# Altium PCB StairMastersPDB.PcbDoc
Units mil, origin at the board's own origin, x right, y up, seen from the top; angles counter-clockwise.
Board outline 6000 x 4000 mil, 4 copper layers (Top Layer, Layer 1, Layer 2, Bottom Layer), stack 23.756 mil thick; 139 components, 64 nets, 341 pads, 36 vias.
Unrouted connection lines stored in the file: 7.
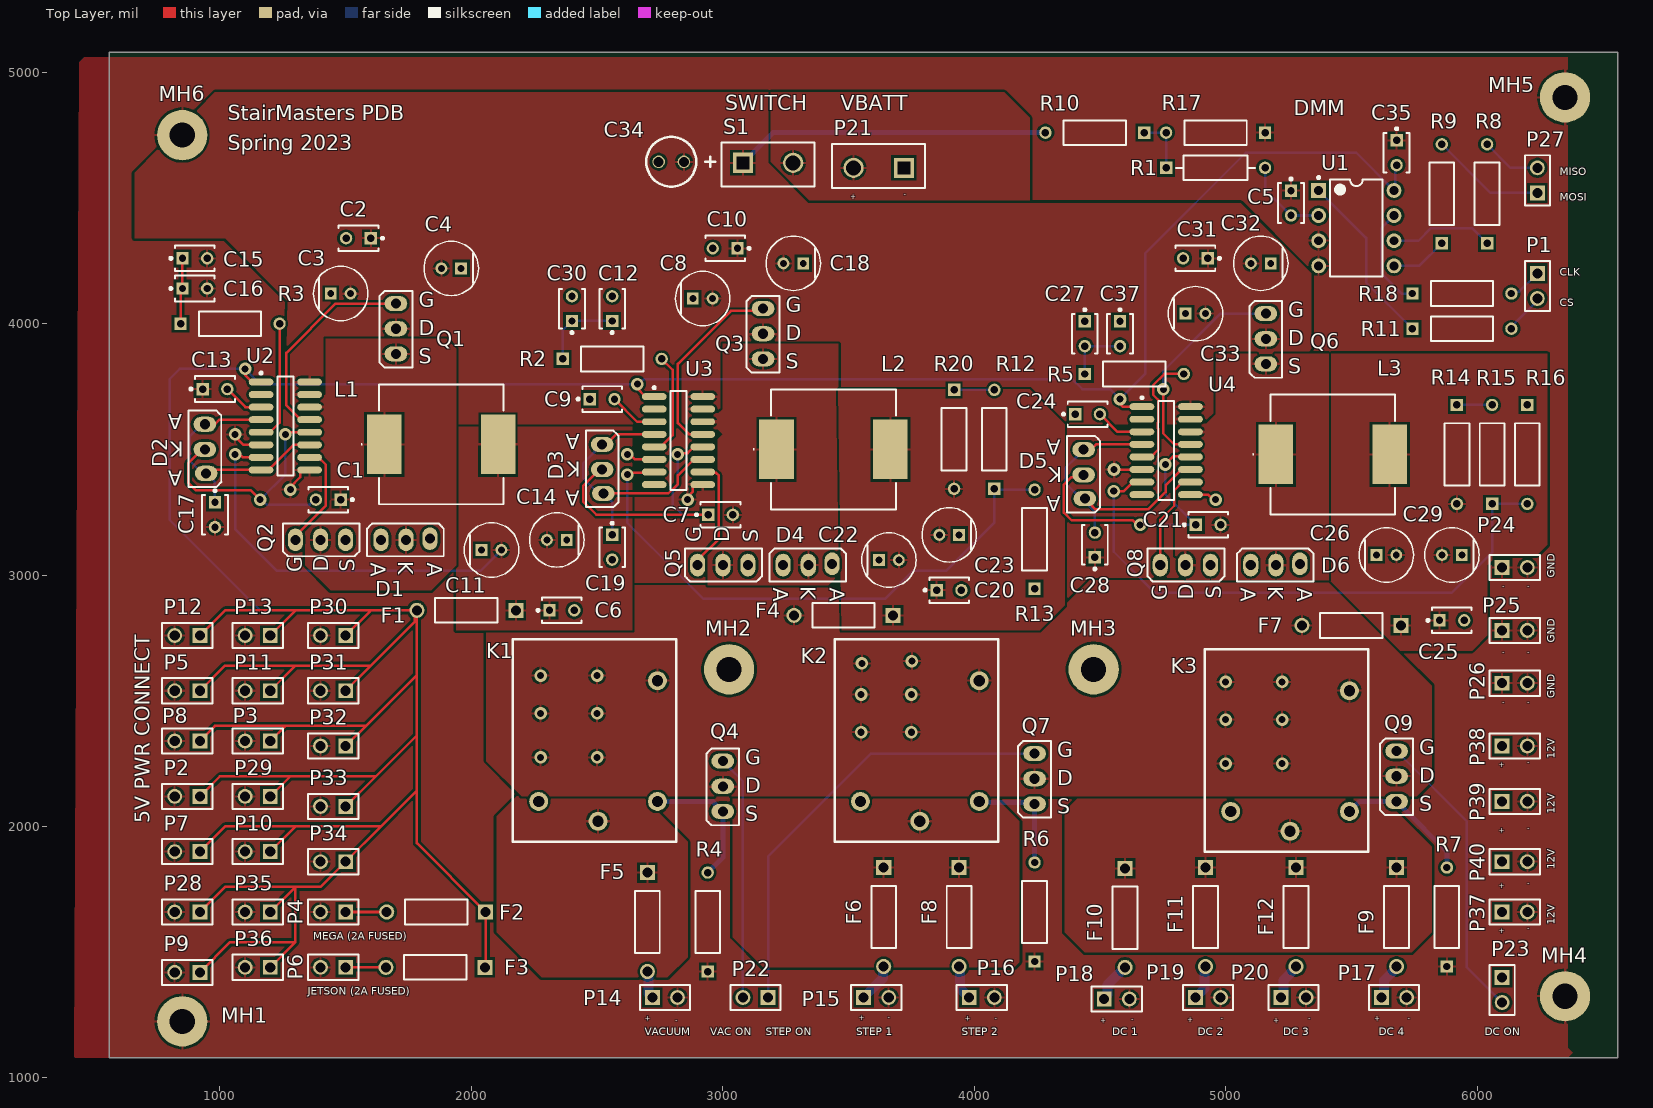
[diagram p0: Top Layer view]
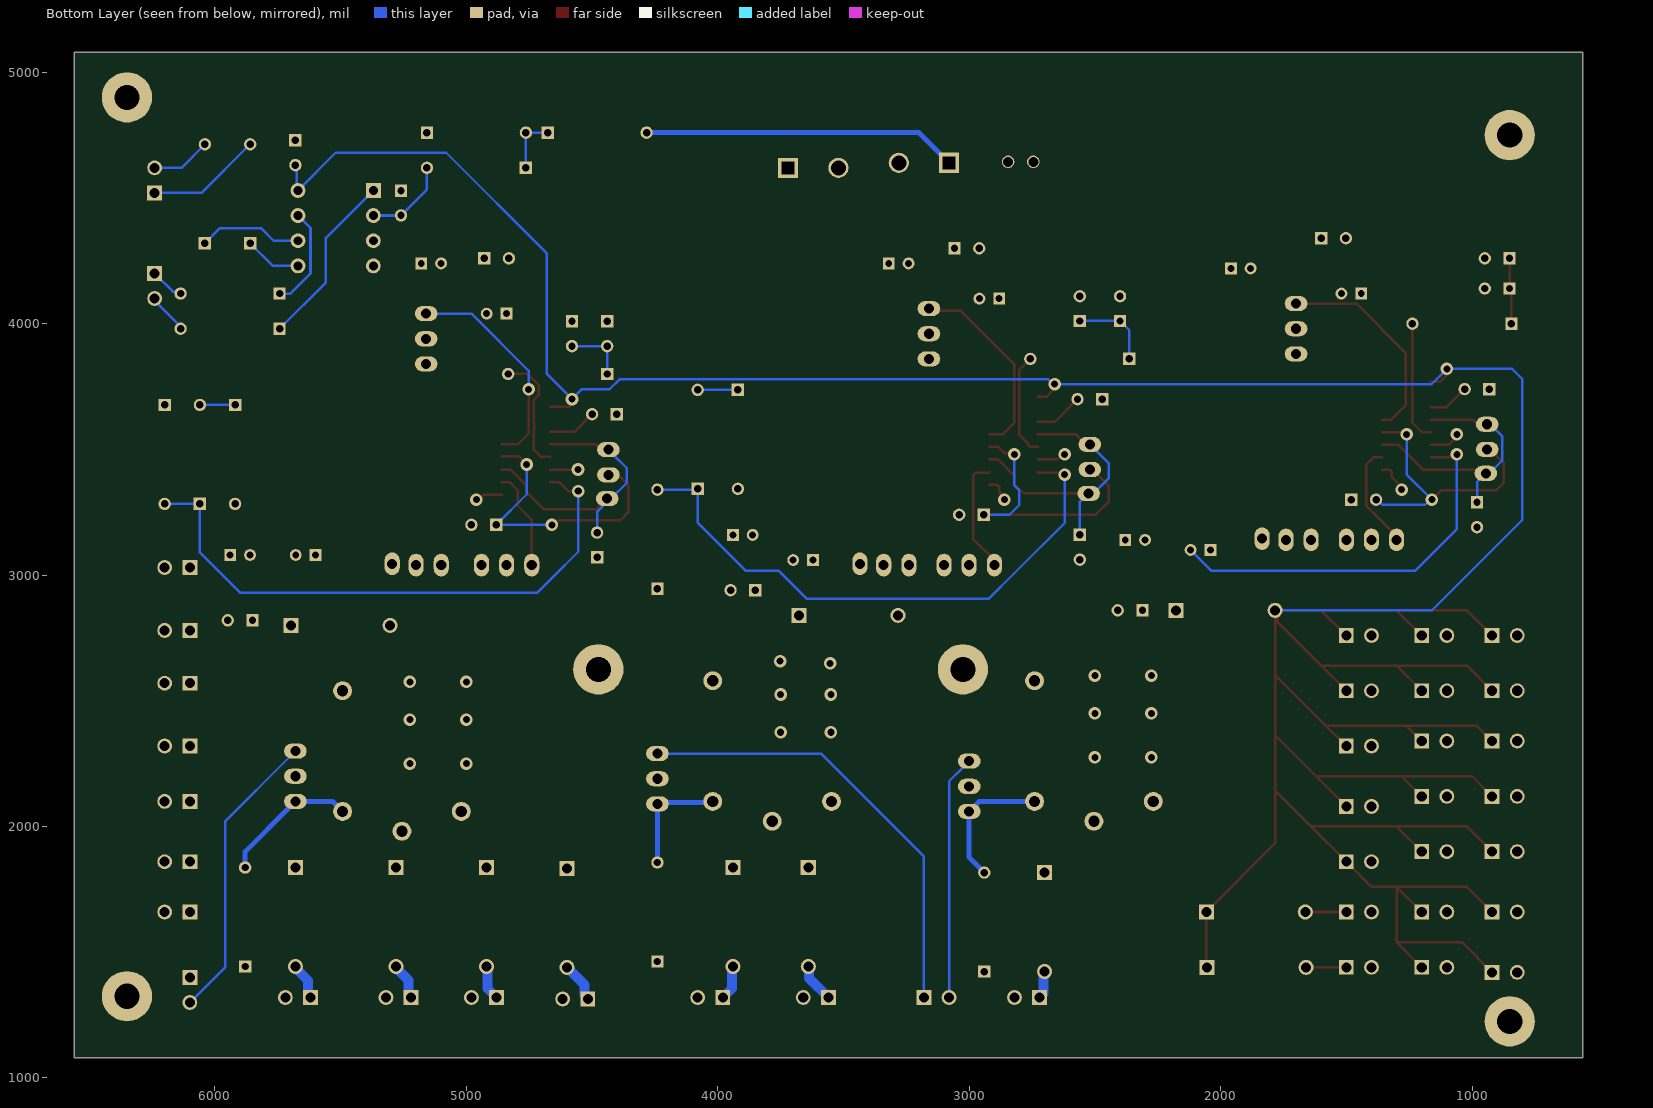
[diagram p1: Bottom Layer view, seen from below]
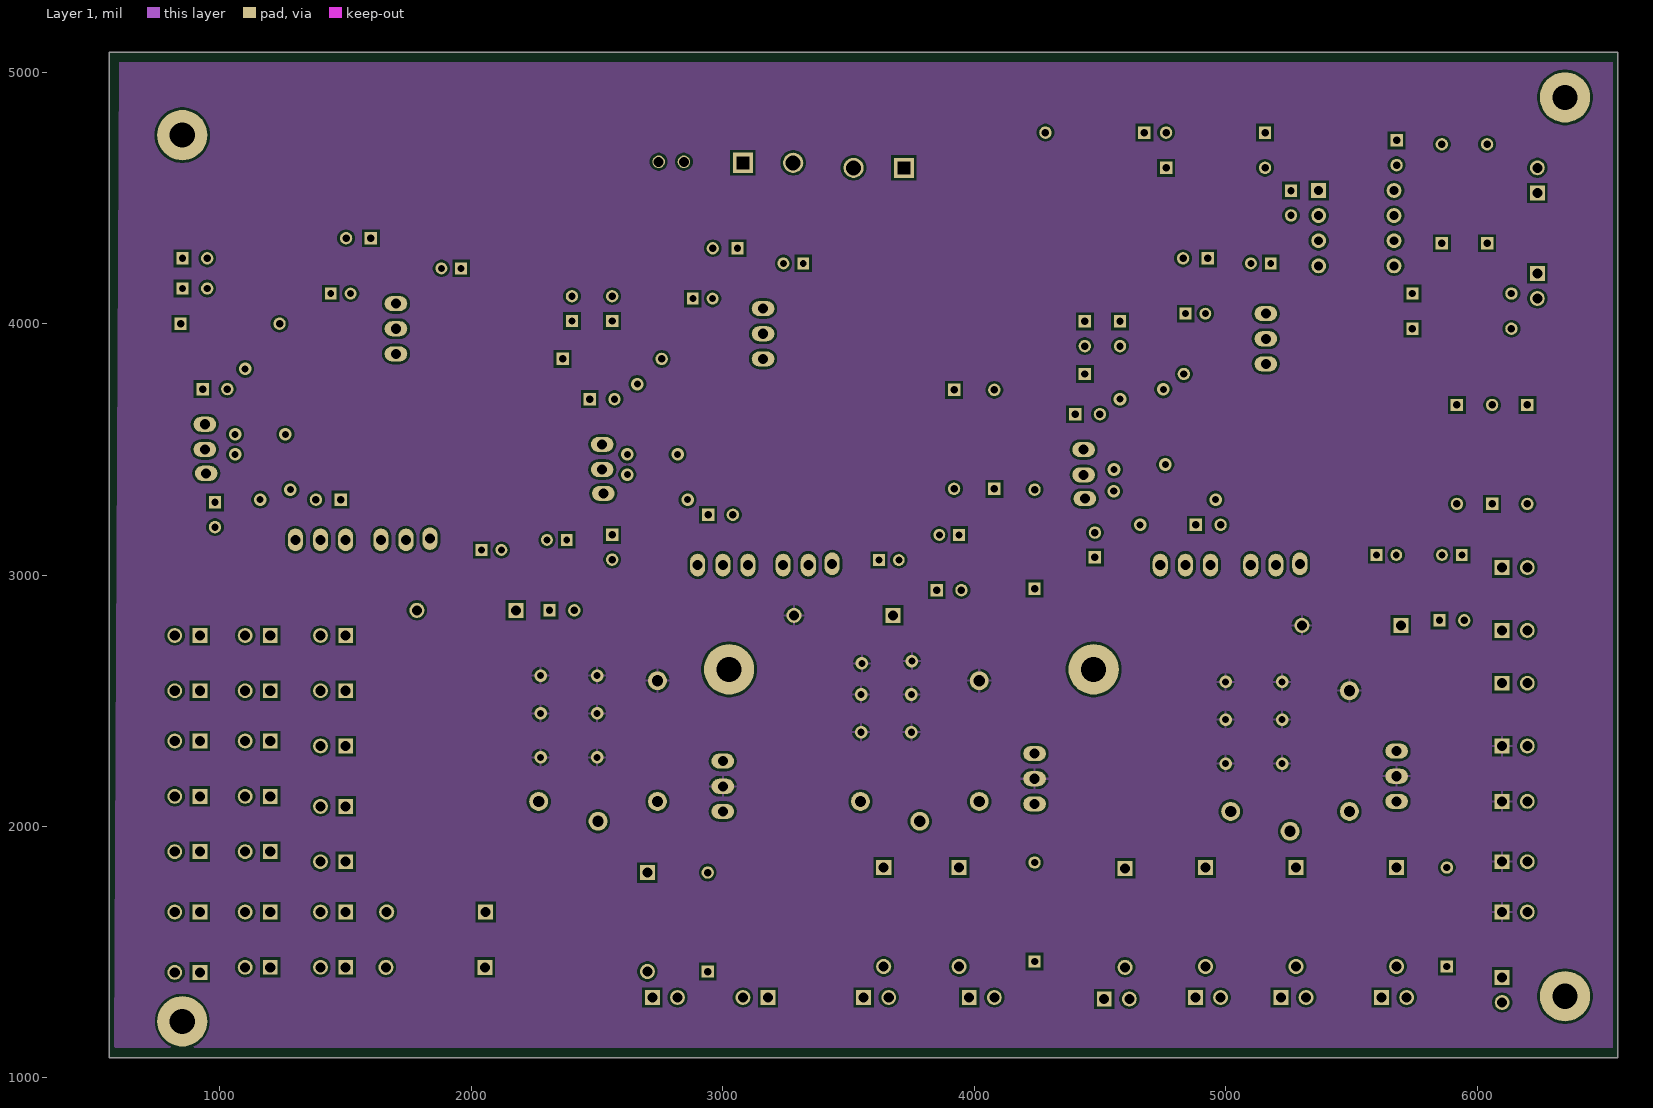
[diagram p2: Layer 1]
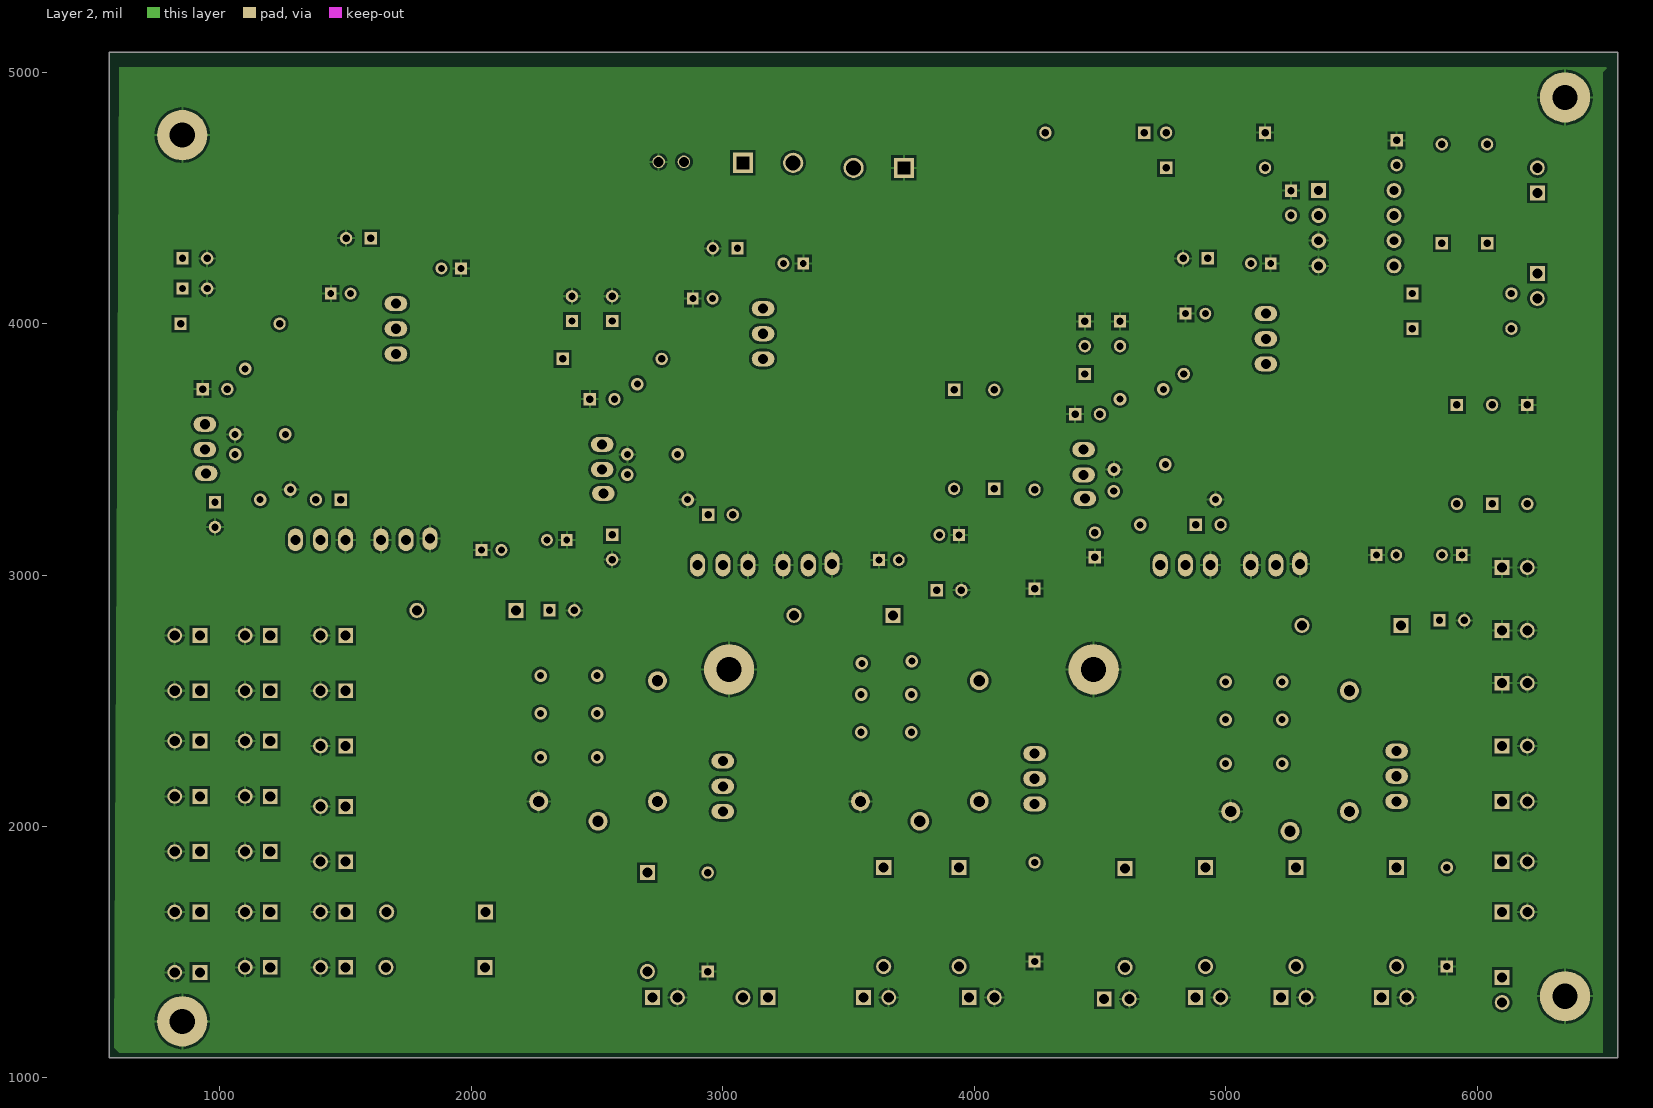
[diagram p3: Layer 2]

## Layer stack, top to bottom
Top Solder: solder mask 0.4, Solder Resist, Dk 3.5
Top Layer: signal copper 1.4
Dielectric 2: prepreg 2.8, PP-006, Dk 4.1
Layer 1: signal copper 1.378
Dielectric 1: dielectric 12.6, FR-4, Dk 4.8
Layer 2: signal copper 1.378
Dielectric 3: prepreg 2.8, PP-006, Dk 4.1
Bottom Layer: signal copper 1.4
Bottom Solder: solder mask 0.4, Solder Resist, Dk 3.5

## Board outline
560,1080 6560,1080 6560,5080 560,5080

## Design rules (kind name [scope] priority, off if disabled: settings)
Clearance [All] p1: gap=10 ignorepadtopadclearanceinfootprint=FALSE except(0: Arc-Hole Track-Hole SMDPad-Hole THPad-Hole Via-Hole Fill-Hole Poly-Hole Region-Hole Text-Hole)
PolygonConnect [All] p1: connectstyle=Relief reliefconductorwidth=10 reliefentries=4 polygonreliefangle="90 Angle" airgapwidth=10
RoutingVias [All] p1: holewidth=28 width=50 viastyle="Through Hole" minholewidth=28 minwidth=50 maxholewidth=28 maxwidth=50
SolderMaskExpansion [All] p1: expansion=4 istentingtop=FALSE
Width [All] p1: maxlimit=100 minlimit=10 preferedwidth=10
30 further rules are at their usual default settings.

## Components (designator, comment, footprint, x,y, rotation, side; value= is the part's Value field where it differs from the comment)
C1 "0.33uF" VISH-K104K15X7RF5TL2 1430.79,3300 r180 top
C2 "0.1uF" VISH-K104K15X7RF5TL2 1550.79,4340 r180 top
C3 "10uF" FP-RAD-TH-D_5_0_5-L_11_1-MFG 1480,4120 r0 top
C4 "10uF" FP-RAD-TH-D_5_0_5-L_11_1-MFG 1920,4220 r180 top
C5 "0.1uF" VISH-K104K15X7RF5TL2 5260,4480 r270 top
C6 "0.1uF" VISH-K104K15X7RF5TL2 2360,2860 r0 top
C7 "0.33uF" VISH-K104K15X7RF5TL2 2990.79,3240 r0 top
C8 "10uF" FP-RAD-TH-D_5_0_5-L_11_1-MFG 2920,4100 r0 top
C9 "0.1uF" VISH-K104K15X7RF5TL2 2520,3700 r0 top
C10 "0.1uF" VISH-K104K15X7RF5TL2 3009.21,4300 r180 top
C11 "10uF" FP-RAD-TH-D_5_0_5-L_11_1-MFG 2080,3100 r0 top
C12 "1nF" VISH-K104K15X7RF5TL2 2560,4060 r90 top
C13 "0.1uF" VISH-K104K15X7RF5TL2 980,3740 r0 top
C14 "10uF" FP-RAD-TH-D_5_0_5-L_11_1-MFG 2340,3140 r180 top
C15 "1nF" VISH-K104K15X7RF5TL2 900,4260 r0 top
C16 "1nF" VISH-K104K15X7RF5TL2 900,4140 r0 top
C17 "4.7uF" VISH-K104K15X7RF5TL2 980,3240 r270 top
C18 "10uF" FP-RAD-TH-D_5_0_5-L_11_1-MFG 3280.63,4240 r180 top
C19 "4.7uF" VISH-K104K15X7RF5TL2 2560,3110.79 r270 top
C20 "0.1uF" VISH-K104K15X7RF5TL2 3900,2940 r0 top
C21 "0.33uF" VISH-K104K15X7RF5TL2 4930.79,3200 r0 top
C22 "10uF" FP-RAD-TH-D_5_0_5-L_11_1-MFG 3660.63,3060 r0 top
C23 "10uF" FP-RAD-TH-D_5_0_5-L_11_1-MFG 3900.63,3160 r180 top
C24 "0.1uF" VISH-K104K15X7RF5TL2 4450.79,3640 r0 top
C25 "0.1uF" VISH-K104K15X7RF5TL2 5900,2820 r0 top
C26 "10uF" FP-RAD-TH-D_5_0_5-L_11_1-MFG 5639.37,3080 r0 top
C27 "1nF" VISH-K104K15X7RF5TL2 4440,3960 r270 top
C28 "4.7uF" VISH-K104K15X7RF5TL2 4480,3120 r90 top
C29 "10uF" FP-RAD-TH-D_5_0_5-L_11_1-MFG 5900,3080 r180 top
C30 "1nF" VISH-K104K15X7RF5TL2 2400,4060 r90 top
C31 "0.1uF" VISH-K104K15X7RF5TL2 4880,4260 r180 top
C32 "10uF" FP-RAD-TH-D_5_0_5-L_11_1-MFG 5140,4240 r180 top
C33 "10uF" FP-RAD-TH-D_5_0_5-L_11_1-MFG 4880,4040 r0 top
C34 "39uF" polarized_radial_cap_TH 2745,4644 r0 top
C35 "0.1uF" VISH-K104K15X7RF5TL2 5680,4680 r270 top
C37 "1nF" VISH-K104K15X7RF5TL2 4580,3960 r270 top
D1 "20A Diode" DIODE-3-TH 1740,3140 r270 top
D2 "20A Diode" DIODE-3-TH 940,3500 r180 top
D3 "20A Diode" DIODE-3-TH 2520,3420 r180 top
D4 "20A Diode" DIODE-3-TH 3340,3040 r270 top
D5 "20A Diode" DIODE-3-TH 4435,3399 r180 top
D6 "20A Diode" DIODE-3-TH 5200,3040 r270 top
F1 "20A Fuse" TH_RESISTOR 1980,2860 r180 top
F2 "2A Fuse" TH_RESISTOR 1860,1660 r180 top
F3 "2A Fuse" TH_RESISTOR 1856.85,1440 r180 top
F4 "20A Fuse" TH_RESISTOR 3480,2840 r180 top
F5 "10A Fuse" TH_RESISTOR 2700,1620 r270 top
F6 "1.5A Fuse" TH_RESISTOR 3640,1640 r270 top
F7 "20A Fuse" TH_RESISTOR 5500,2800 r180 top
F8 "1.5A Fuse" TH_RESISTOR 3940,1640 r270 top
F9 "5A Fuse" TH_RESISTOR 5680,1640 r270 top
F10 "5A Fuse" TH_RESISTOR 4600,1636.85 r270 top
F11 "5A Fuse" TH_RESISTOR 4920,1640 r270 top
F12 "5A Fuse" TH_RESISTOR 5280,1640 r270 top
K1 "3-1393239-8" PR12-12V-360-1A 2740,2099.68 r270 top
K2 "3-1393239-8" PR12-12V-360-1A 4020,2099.68 r270 top
K3 "3-1393239-8" PR12-12V-360-1A 5492.44,2060 r270 top
L1 "2.2uH" SRP1265WA2R2M 1880,3520 r0 top
L2 "2.2uH" SRP1265WA2R2M 3440,3500 r0 top
L3 "2.2uH" SRP1265WA2R2M 5426.38,3480 r0 top
MH1 "Mech_hole" "Mounting Hole" 850,1225 r0 top
MH2 "Mech_hole" "Mounting Hole" 3025,2625 r0 top
MH3 "Mech_hole" "Mounting Hole" 4475,2625 r0 top
MH4 "Mech_hole" "Mounting Hole" 6350,1325 r0 top
MH5 "Mech_hole" "Mounting Hole" 6350,4900 r0 top
MH6 "Mech_hole" "Mounting Hole" 850,4750 r0 top
P1 "Header 2" HDR1X2 6240,4200 r270 top
P2 "Header 2" HDR1X2 920,2120 r180 top
P3 "Header 2" HDR1X2 1200,2340 r180 top
P4 "Header 2" HDR1X2 1500,1660 r180 top
P5 "Header 2" HDR1X2 920,2540 r180 top
P6 "Header 2" HDR1X2 1500,1440 r180 top
P7 "Header 2" HDR1X2 920,1900 r180 top
P8 "Header 2" HDR1X2 920,2340 r180 top
P9 "Header 2" HDR1X2 920,1420 r180 top
P10 "Header 2" HDR1X2 1200,1900 r180 top
P11 "Header 2" HDR1X2 1200,2540 r180 top
P12 "Header 2" HDR1X2 920,2760 r180 top
P13 "Header 2" HDR1X2 1200,2760 r180 top
P14 "Header 2" HDR1X2 2720,1320 r0 top
P15 "Header 2" HDR1X2 3560,1320 r0 top
P16 "Header 2" HDR1X2 3980,1320 r0 top
P17 "Header 2" HDR1X2 5620,1320 r0 top
P18 "Header 2" HDR1X2 4517,1314 r0 top
P19 "Header 2" HDR1X2 4880,1320 r0 top
P20 "Header 2" HDR1X2 5220,1320 r0 top
P21 "Header 2" PWR_HDR1X2 3720,4620 r180 top
P22 "Header 2" HDR1X2 3180,1320 r180 top
P23 "Header 2" HDR1X2 6100,1400 r270 top
P24 "Header 2" HDR1X2 6100,3030 r0 top
P25 "Header 2" HDR1X2 6100,2780 r0 top
P26 "Header 2" HDR1X2 6100,2570 r0 top
P27 "Header 2" HDR1X2 6240,4520 r90 top
P28 "Header 2" HDR1X2 920,1660 r180 top
P29 "Header 2" HDR1X2 1200,2120 r180 top
P30 "Header 2" HDR1X2 1500,2760 r180 top
P31 "Header 2" HDR1X2 1500,2540 r180 top
P32 "Header 2" HDR1X2 1500,2320 r180 top
P33 "Header 2" HDR1X2 1500,2080 r180 top
P34 "Header 2" HDR1X2 1500,1860 r180 top
P35 "Header 2" HDR1X2 1200,1660 r180 top
P36 "Header 2" HDR1X2 1200,1440 r180 top
P37 "Header 2" HDR1X2 6100,1660 r0 top
P38 "Header 2" HDR1X2 6100,2320 r0 top
P39 "Header 2" HDR1X2 6100,2100 r0 top
P40 "Header 2" HDR1X2 6100,1860 r0 top
Q1 "MOSFET-N" FET-3-TH 1700,3980 r0 top
Q2 "MOSFET-N" FET-3-TH 1400,3140 r90 top
Q3 "MOSFET-N" FET-3-TH 3160,3960 r0 top
Q4 "MOSFET-N" FET-3-TH 3000,2160 r0 top
Q5 "MOSFET-N" FET-3-TH 3000,3040 r90 top
Q6 "MOSFET-N" FET-3-TH 5160,3940 r0 top
Q7 "MOSFET-N" FET-3-TH 4240,2190 r0 top
Q8 "MOSFET-N" FET-3-TH 4840,3040 r90 top
Q9 "MOSFET-N" FET-3-TH 5680,2200 r0 top
R1 "1kOhm" FP-MRS25-MFG 4960,4620 r0 top
R2 "10k" FP-MBB0207-MFG 2560,3860 r0 top
R3 "10k" FP-MBB0207-MFG 1040,4000 r0 top
R4 "10k" FP-MBB0207-MFG 2940,1620 r90 top
R5 "10k" FP-MBB0207-MFG 4636.85,3800 r0 top
R6 "10k" FP-MBB0207-MFG 4240,1660 r90 top
R7 "10k" FP-MBB0207-MFG 5880,1640 r90 top
R8 "100Ohm" FP-MBB0207-MFG 6040,4516.85 r90 top
R9 "100Ohm" FP-MBB0207-MFG 5860,4516.85 r90 top
R10 "15k" FP-MBB0207-MFG 4480,4760 r180 top
R11 "100Ohm" FP-MBB0207-MFG 5940,3980 r0 top
R12 "10k" FP-MBB0207-MFG 4080,3540 r90 top value=100kR
R13 "2.2k" FP-MBB0207-MFG 4240,3143.15 r90 top value=11kR
R14 "10k" FP-MBB0207-MFG 5920,3480 r270 top value=100kR
R15 "10k" FP-MBB0207-MFG 6060,3480 r90 top value=100kR
R16 "2.2K" FP-MBB0207-MFG 6200,3480 r270 top value=11kR
R17 "5k" FP-MBB0207-MFG 4960,4760 r180 top
R18 "100Ohm" FP-MBB0207-MFG 5940,4120 r0 top
R20 "10k" FP-MBB0207-MFG 3920,3540 r270 top value=100kR
S1 "PWR_SW" PWR_HDR1X2 3080,4640 r0 top
U1 "MCP3202-CI/P" PDIP300-P8 5520,4380 r0 top
U2 "LTC1775CS#PBF" LT-S-16_M 1260,3593.15 r0 top
U3 "LTC1775CS#PBF" LT-S-16_M 2823.54,3535 r0 top
U4 "LTC1775CS#PBF" LT-S-16_M 4763.54,3495 r0 top

## Footprints (in the part's own frame and the unit in brackets; to place one, negate y for a bottom-side part, rotate by r counter-clockwise, add the part's x,y. Pads: shape width x height; smd on the part's side, far side on the other; paste and mask are expansions set on the pad)
DIODE-3-TH [mil] "TO, Flat Index; 3 In-Line, Axial Leads; Body Dia. 4.6mm; Lead Dia. 0.5 mm (max)"
  oval 90x60 hole 40: 1(-5,95) 2(0,0) 3(0,-100)
  silkscreen extent -66,-155 65,150
FET-3-TH [mil] "TO, Flat Index; 3 In-Line, Axial Leads; Body Dia. 4.6mm; Lead Dia. 0.5 mm (max)"
  oval 90x60 hole 40: 1(0,0) 2(0,100) 3(0,-100)
  silkscreen extent -66,-155 65,150
FP-MBB0207-MFG [mm]
  rect 1.25x1.25 hole 0.75 paste-1000 mask+0: 1(-5,0)
  round 1.25 hole 0.75 paste-1000 mask+0: 2(5,0)
  silkscreen extent -3.15,-1.25 3.15,1.25, body extent -5.72,-1.35 5.72,1.35, height 0.25
FP-MRS25-MFG [mm]
  rect 1.25x1.25 hole 0.75 paste-1000 mask+0: 1(-5,0)
  round 1.25 hole 0.75 paste-1000 mask+0: 2(5,0)
  silkscreen extent -3.98,-1.25 3.98,1.25, body extent -5.72,-1.35 5.72,1.35, height 0.25
FP-RAD-TH-D_5_0_5-L_11_1-MFG [mm]
  rect 1.2x1.2 hole 0.7 paste-1000 mask+0: 1(-1,0)
  round 1.2 hole 0.7 paste-1000 mask+0: 2(1,0)
  silkscreen extent -2.75,-2.75 2.75,2.75, body extent -2.85,-2.85 2.85,2.85, height 0.25
HDR1X2 [mm] "Connector; Header; 2 Position"
  rect 1.5x1.5 hole 1.016: 1(0,0)
  round 1.5 hole 1.016: 2(2.54,0)
  silkscreen extent -1.27,-1.27 3.81,1.27
LT-S-16_M [mm] "SOP, 16-Leads, Body 10x4mm, Pitch 1.27mm, IPC Low Density"
  oval 2.5x0.7 smd: 1(-2.45,4.445) 2(-2.45,3.175) 3(-2.45,1.905) 4(-2.45,0.635) 5(-2.45,-0.635) 6(-2.45,-1.905) 7(-2.45,-3.175) 8(-2.45,-4.445) 9(2.45,-4.445) 10(2.45,-3.175) 11(2.45,-1.905) 12(2.45,-0.635) 13(2.45,0.635) 14(2.45,1.905) 15(2.45,3.175) 16(2.45,4.445)
  silkscreen extent -2.57,-5 0.8,5.47, body extent -2,-5 2,5, height 1.76
"Mounting Hole" [mil]
  round 200 hole 100: 1(0,0)
PDIP300-P8 [mm] "8-Pin Plastic Dual In-Line Package (PDIP)"
  rect 1.5x1.5 hole 0.9: 1(-3.81,3.81)
  round 1.5 hole 0.9: 2(-3.81,1.27) 3(-3.81,-1.27) 4(-3.81,-3.81) 5(3.81,-3.81) 6(3.81,-1.27) 7(3.81,1.27) 8(3.81,3.81)
  silkscreen extent -3.93,-4.9 2.65,5.23, body extent -3.55,-4.9 3.55,4.9, height 4.32
polarized_radial_cap_TH [mil]
  round 50 hole 40: 1(0,0) 2(100,0)
  silkscreen extent -49,-99 225,99
PR12-12V-360-1A [mil] "General Puropse Relay"
  round 75 hole 45: 1(0,0) 2(78.74,-236.22) 3(0,-472.44) 4(-480.32,0)
  silkscreen extent -645,-575 160,75
PWR_HDR1X2 [mil] "Power Connector; Header; 2 Position"
  rect 80x80 hole 50 square: 1(0,0)
  round 80 hole 60: 2(200,0)
  silkscreen extent -85,-95 285,80
SRP1265WA2R2M [mm]
  rect 3.5x6 smd: 1(-5.75,0) 2(5.75,0)
  silkscreen extent -8.1,-6.05 6.3,6.05, body extent -10,-3.38 10,3.38, height 5.8
TH_RESISTOR [mil]
  rect 60x60 hole 40 paste-39370.1 mask+0: 1(-196.85,0)
  round 60 hole 40 paste-39370.1 mask+0: 2(196.85,0)
  silkscreen extent -124,-49 124,49, body extent -225,-53 225,53, height 10
VISH-K104K15X7RF5TL2 [mm] "THD, 2-Leads, Body 4x2.6mm"
  rect 1.25x1.25 hole 0.75: 1(-1.25,0)
  round 1.25 hole 0.75: 2(1.25,0)
  silkscreen extent -2.55,-1.3 2,1.3, body extent -2,-1.3 2,1.3, height 5.6

## Part data
C1 C2 C5 C6 C7 C9 C10 C12 C13 C15 C16 C17 C19 C20 C21 C24 C25 C27 C28 C30 C31 C35 C37: library part CMP-2000-06508-1, "Ceramic Capacitor, 100 nF, +/- 10%, 50 V, -55 to 125 degC, 2-Pin THD, RoHS, Tape and Reel", Capacitance=0.1µF, Manufacturer=Vishay, Operating Temperature=-55°C~125°C, Package / Case=Radial, Package Description="2-Pin Through Hole Device, Body 4 x 2.6 mm", Package Reference=K104K15X7RF5TL2, Ratings=-, Standard Package=1, Temperature Coefficient=X7R, Tolerance=±10%, Voltage - Rated=50V, Applications=GeneralPurpose, Catalog Drawings=Mono-KapSide2-15_5.58Mono-KapSide1_15, Category=Capacitors, Datasheet URL=http://www.vishay.com/docs/45171/kseries.pdf, Datasheet Version=08/2013, Family=CeramicCapacitors, Features=-, Height - Seated (Max)="0.220\"(5.58mm)", Lead Spacing="0.098\"(2.50mm)", Lead Style=Straight, Manufacturer URL=http://www.vishay.com/, Mounting Technology=ThroughHole, Mounting Type=ThroughHole, Online Catalog=Mono-Kap™Series, Other Names=BC1084CT, Packaging=CutTape(CT), Series=Mono-Kap™K, Size / Dimension="0.157\"Lx0.098\"W(4.00mmx2.50mm)", Thickness (Max)=-
C3 C4 C8 C11 C14 C18 C22 C23 C26 C29 C32 C33: library part CMP-05427-001989-1, "Aluminum Electrolytic Capacitors (Radial Lead Type) AEC-Q200 Qualified 22uF ±20% 50V", Capacitance=22uF, Case/Package=Radial, ESR (Equivalent Series Resistance)=1.3R, Leakage Current=3uA, Max Operating Temperature=105°C, Min Operating Temperature=-55°C, Package Quantity=2000, Ripple Current=155mA, Tolerance=20%, Voltage Rating=50V, Contact Plating=Tin, Diameter=5mm, Features="General Purpose", Height=11mm, Height - Seated (Max)=0.472inch, Impedance=1.3R, Lead Diameter=0.5mm, Lead Pitch=0.197inch, Length=11mm, Life (Hours)=1000Hour, Mount="Through Hole", Packaging="Tape and Reel", Polarity=Polar, Radiation Hardening=No, RoHS Compliant=Yes, Series=FC, Termination=Radial, Voltage Rating (DC)=50V
C34: library part "39uF capacitor", "Cap Aluminum 39uF 25V 20% (6.3 X 7mm) Radial 5mm 200mA 1000 hr 105C Ammo Pack", Manufacturer=Panasonic, Manufacturer Part Number=EEA-FC1E390B, Supplier Part Number=667-EEA-FC1E390B, Category="Aluminum Electrolytic Capacitors", ComponentLink1Description=https://datasheet.ciiva.com/24234/aba0000ce22-68457-24234377.pdf?src-supplier=Mouser, ComponentLink1URL=https://datasheet.ciiva.com/24234/aba0000ce22-68457-24234377.pdf?src-supplier=Mouser, ComponentLink2Description=https://datasheet.ciiva.com/11680/aba0000ce22-11680271.pdf?src-supplier=Avnet, ComponentLink2URL=https://datasheet.ciiva.com/11680/aba0000ce22-11680271.pdf?src-supplier=Avnet, Pricing="1=0.47000, 10=0.32500, 50=0.22800, 100=0.19500, 1000=0.14700, 10000=0.11000 (USD)", RoHS=Yes, Stock=1295, Supplier=Mouser
D1 D2 D3 D4 D5 D6: Manufacturer=Rohm, Manufacturer Part Number=RB215T-90NZC9, Supplier Part Number=755-RB215T-90NZC9, ComponentLink1Description=http://datasheet.octopart.com/RB215T-90NZC9-Rohm-datasheet-142143394.pdf?src-supplier=Rs, ComponentLink1URL=http://datasheet.octopart.com/RB215T-90NZC9-Rohm-datasheet-142143394.pdf?src-supplier=Rs, Pricing="1=3.30000, 10=2.96000, 50=2.96000, 100=2.43000, 500=2.07000, 1000=1.74000, 2000=1.61000, 5000=1.59000, 10000=1.59000 (USD)", RoHS=No, Stock=1994, Supplier=Mouser
F1 F4 F7: "Electric Fuse, Fast Blow, 20A, 1000A (IR), 3AB", Current Rating=20A, Manufacturer=Littelfuse, Manufacturer Part Number=0314020.MX52LEP, Max Operating Temperature=125°C, Min Operating Temperature=-55°C, Pre-arcing Rating=631A2/s, Rated Breaking Capacity=1kA, Supplier Part Number=0314020.MX52LEP-ND, Voltage Rating=250V, Blow Characteristic=FAST, Body Height=31.75mm, Body Length or Diameter=6.35mm, Category=Fuses, Circuit Protection Type="Electric Fuse", ComponentLink1Description=https://datasheet.ciiva.com:443/pdfs/VipMasterIC/IC/LFSI/LFSI-S-A0000790503/LFSI-S-A0000790503-1.pdf?src-supplier=IHS+Markit, ComponentLink1URL=https://datasheet.ciiva.com:443/pdfs/VipMasterIC/IC/LFSI/LFSI-S-A0000790503/LFSI-S-A0000790503-1.pdf?src-supplier=IHS+Markit, ComponentLink2Description=https://datasheet.ciiva.com/304/littelfuse-fuse-314p-324p-304224.pdf?src-supplier=Digi-Key, ComponentLink2URL=https://datasheet.ciiva.com/304/littelfuse-fuse-314p-324p-304224.pdf?src-supplier=Digi-Key, Fuse Size=3AB, Pricing="1=1.59000, 5=1.54200, 10=1.44200, 50=1.19300, 100=0.99420, 250=0.96940, 500=0.82026, 1000=0.72083, 5000=0.64626 (USD)", Reach SVHC Compliant=Yes, Reference Standard=UL, RoHS=Yes, RoHS Compliant=Yes, Stock=2925, Supplier=Digi-Key, Terminal Finish=Nickel, Termination="End Cap"
F2 F3: "Fuse Subminiature Very Fast Acting 2A 125V Axial 2.8 X 7.11mm Ceramic T/R", Current Rating=2A, Manufacturer=Littelfuse, Manufacturer Part Number=0251002.MRT1L, Max Operating Temperature=125°C, Min Operating Temperature=-55°C, Pre-arcing Rating=0.405A2/s, Rated Breaking Capacity=50A, Supplier Part Number=7081334, Voltage Rating=125V, Blow Characteristic="VERY FAST", Body Height=7.11mm, Body Length or Diameter=2.8mm, Category=Fuses, Circuit Protection Type="Electric Fuse", ComponentLink1Description=https://datasheet.ciiva.com:443/pdfs/VipMasterIC/IC/LFSI/LFSI-S-A0001360260/LFSI-S-A0001360260-1.pdf?src-supplier=IHS+Markit, ComponentLink1URL=https://datasheet.ciiva.com:443/pdfs/VipMasterIC/IC/LFSI/LFSI-S-A0001360260/LFSI-S-A0001360260-1.pdf?src-supplier=IHS+Markit, ComponentLink2Description=https://datasheet.ciiva.com/299/littelfuse-fuse-251-253-datasheet-pdf-299253.pdf?src-supplier=Digi-Key, ComponentLink2URL=https://datasheet.ciiva.com/299/littelfuse-fuse-251-253-datasheet-pdf-299253.pdf?src-supplier=Digi-Key, ComponentLink3Description=https://datasheet.ciiva.com/299/littelfuse-fuse-251-253-datasheet-pdf-299254.pdf?src-supplier=Digi-Key, ComponentLink3URL=https://datasheet.ciiva.com/299/littelfuse-fuse-251-253-datasheet-pdf-299254.pdf?src-supplier=Digi-Key, ComponentLink4Description=https://datasheet.ciiva.com/22658/88912-22658587.pdf?src-supplier=Element14, ComponentLink4URL=https://datasheet.ciiva.com/22658/88912-22658587.pdf?src-supplier=Element14, ComponentLink5Description=https://datasheet.ciiva.com/28363/88912-28363277.pdf?src-supplier=Element14, ComponentLink5URL=https://datasheet.ciiva.com/28363/88912-28363277.pdf?src-supplier=Element14, ComponentLink6Description=https://datasheet.ciiva.com/1548/251-253-1548974.pdf?src-supplier=Element14, ComponentLink6URL=https://datasheet.ciiva.com/1548/251-253-1548974.pdf?src-supplier=Element14, ComponentLink7Description=https://datasheet.ciiva.com/16328/251-253-16328168.pdf?src-supplier=Future+Electronics, ComponentLink7URL=https://datasheet.ciiva.com/16328/251-253-16328168.pdf?src-supplier=Future+Electronics, ComponentLink8Description=https://datasheet.ciiva.com/15187/getdatasheetpartid-116773-15187142.pdf?src-supplier=Verical, ComponentLink8URL=https://datasheet.ciiva.com/15187/getdatasheetpartid-116773-15187142.pdf?src-supplier=Verical, ComponentLink9Description=https://datasheet.ciiva.com/1681/88912-1681245.pdf?src-supplier=Farnell, ComponentLink9URL=https://datasheet.ciiva.com/1681/88912-1681245.pdf?src-supplier=Farnell, Fuse Class=Supplemental, Fuse Size=PICO, JESD-609 Code=e3, Joule-integral-Nom=0.405J, Mounting Technology="Through Hole", Packaging="Tape and Reel", Pricing="1000=0.40000, 3000=0.39000, 5000=0.38500, 15000=0.37500, 25000=0.36500 (USD)", Reach SVHC Compliant=No, Reference Standard=UL, RoHS=Yes, RoHS Compliant=Yes, Stock=107000, Supplier="Future Electronics", Terminal Finish=Tin, Termination="Pin Wire", Voltage Rating (AC)=125V, Voltage Rating (DC)=125V
F5: "Fuse Subminiature Very Fast Acting 10A 125V Axial 2.8 X 7.11mm Ceramic Ammo Pack", Current Rating=10A, Manufacturer=Littelfuse, Manufacturer Part Number=0251010.HAT1L, Max Operating Temperature=125°C, Min Operating Temperature=-55°C, Rated Breaking Capacity=50A, Supplier Part Number=9469693, Voltage Rating (AC)=125V, Blow Characteristic="VERY FAST", Body Height=7.11mm, Body Length or Diameter=2.8mm, Category=Fuses, Circuit Protection Type="Electric Fuse", ComponentLink1Description=https://datasheet.ciiva.com:443/pdfs/VipMasterIC/IC/LFSI/LFSI-S-A0001360260/LFSI-S-A0001360260-1.pdf?src-supplier=IHS+Markit, ComponentLink1URL=https://datasheet.ciiva.com:443/pdfs/VipMasterIC/IC/LFSI/LFSI-S-A0001360260/LFSI-S-A0001360260-1.pdf?src-supplier=IHS+Markit, ComponentLink2Description=https://datasheet.ciiva.com/303/littelfuse-fuse-251-253-datasheet-pdf-303888.pdf?src-supplier=Digi-Key, ComponentLink2URL=https://datasheet.ciiva.com/303/littelfuse-fuse-251-253-datasheet-pdf-303888.pdf?src-supplier=Digi-Key, ComponentLink3Description=https://datasheet.ciiva.com/29619/littelfuse-fuse-251-253-datasheet-pdf-29619034.pdf?src-supplier=Digi-Key, ComponentLink3URL=https://datasheet.ciiva.com/29619/littelfuse-fuse-251-253-datasheet-pdf-29619034.pdf?src-supplier=Digi-Key, ComponentLink4Description=https://datasheet.ciiva.com/29619/littelfuse-fuse-251-253-datasheet-pdf-29619033.pdf?src-supplier=Digi-Key, ComponentLink4URL=https://datasheet.ciiva.com/29619/littelfuse-fuse-251-253-datasheet-pdf-29619033.pdf?src-supplier=Digi-Key, JESD-609 Code=e3, Joule-integral-Nom=25.5J, Mounting Technology="Through Hole", Packaging="Ammo Pack", Pricing="100=0.53000, 400=0.51000, 1500=0.49000, 4000=0.47500, 10000=0.45000 (USD)", Reach SVHC Compliant=No, Reference Standard=UL, RoHS=Yes, RoHS Compliant=Yes, Stock=1700, Supplier="Future Electronics", Terminal Finish=Tin, Termination="Pin Wire", Voltage Rating (DC)=125V
F6 F8: "Fuse Subminiature Very Fast Acting 1.5A 125V Axial 2.8 X 7.11mm Ceramic T/R", Current Rating=1.5A, Manufacturer=Littelfuse, Manufacturer Part Number=025101.5MRT1L, Max Operating Temperature=125°C, Min Operating Temperature=-55°C, Pre-arcing Rating=0.587A2/s, Rated Breaking Capacity=50A, Supplier Part Number=7443534, Voltage Rating=125V, Blow Characteristic="VERY FAST", Body Height=7.11mm, Body Length or Diameter=2.8mm, Category=Fuses, Circuit Protection Type="Electric Fuse", ComponentLink1Description=https://datasheet.ciiva.com:443/pdfs/VipMasterIC/IC/LFSI/LFSI-S-A0001360260/LFSI-S-A0001360260-1.pdf?src-supplier=IHS+Markit, ComponentLink1URL=https://datasheet.ciiva.com:443/pdfs/VipMasterIC/IC/LFSI/LFSI-S-A0001360260/LFSI-S-A0001360260-1.pdf?src-supplier=IHS+Markit, ComponentLink2Description=https://datasheet.ciiva.com/28468/88912-28468542.pdf?src-supplier=Element14, ComponentLink2URL=https://datasheet.ciiva.com/28468/88912-28468542.pdf?src-supplier=Element14, ComponentLink3Description=https://datasheet.ciiva.com/301/littelfuse-fuse-251-253-datasheet-pdf-301635.pdf?src-supplier=Digi-Key, ComponentLink3URL=https://datasheet.ciiva.com/301/littelfuse-fuse-251-253-datasheet-pdf-301635.pdf?src-supplier=Digi-Key, ComponentLink4Description=https://datasheet.ciiva.com/301/littelfuse-fuse-251-253-datasheet-pdf-301634.pdf?src-supplier=Digi-Key, ComponentLink4URL=https://datasheet.ciiva.com/301/littelfuse-fuse-251-253-datasheet-pdf-301634.pdf?src-supplier=Digi-Key, Fuse Class=Supplemental, Fuse Size=PICO, JESD-609 Code=e3, Joule-integral-Nom=0.587J, Mounting Technology="Through Hole", Packaging="Tape and Reel", Pricing="1=0.69000, 10=0.59500, 40=0.54000, 150=0.48500, 500=0.44000 (USD)", Reach SVHC Compliant=No, Reference Standard=UL, RoHS=Yes, RoHS Compliant=Yes, Stock=160, Supplier="Future Electronics", Terminal Finish=Tin, Termination="Pin Wire", Voltage Rating (AC)=125V, Voltage Rating (DC)=125V
F9 F10 F11 F12: "Electric Fuse, Very Fast Blow, 5A, 125VAC, 125VDC, 50A (IR), Through Hole", Current Rating=5A, Manufacturer=Littelfuse, Manufacturer Part Number=0251005.NAT1L, Max Operating Temperature=125°C, Min Operating Temperature=-55°C, Rated Breaking Capacity=50A, Supplier Part Number=34AK3121, Voltage Rating (AC)=125V, Blow Characteristic="VERY FAST", Body Height=7.11mm, Body Length or Diameter=2.8mm, Category=Fuses, Circuit Protection Type="Electric Fuse", ComponentLink1Description=https://datasheet.ciiva.com:443/pdfs/VipMasterIC/IC/LFSI/LFSI-S-A0001360260/LFSI-S-A0001360260-1.pdf?src-supplier=IHS+Markit, ComponentLink1URL=https://datasheet.ciiva.com:443/pdfs/VipMasterIC/IC/LFSI/LFSI-S-A0001360260/LFSI-S-A0001360260-1.pdf?src-supplier=IHS+Markit, ComponentLink2Description=https://datasheet.ciiva.com/303/littelfuse-fuse-251-253-datasheet-pdf-303152.pdf?src-supplier=Digi-Key, ComponentLink2URL=https://datasheet.ciiva.com/303/littelfuse-fuse-251-253-datasheet-pdf-303152.pdf?src-supplier=Digi-Key, ComponentLink3Description=https://datasheet.ciiva.com/4492/251-253-45293-4492876.pdf?src-supplier=Mouser, ComponentLink3URL=https://datasheet.ciiva.com/4492/251-253-45293-4492876.pdf?src-supplier=Mouser, ComponentLink4Description=https://datasheet.ciiva.com/18670/littelfuse-fuse-251-253-datasheet-pdf-18670742.pdf?src-supplier=Digi-Key, ComponentLink4URL=https://datasheet.ciiva.com/18670/littelfuse-fuse-251-253-datasheet-pdf-18670742.pdf?src-supplier=Digi-Key, ComponentLink5Description=https://datasheet.ciiva.com/18670/littelfuse-fuse-251-253-datasheet-pdf-18670743.pdf?src-supplier=Digi-Key, ComponentLink5URL=https://datasheet.ciiva.com/18670/littelfuse-fuse-251-253-datasheet-pdf-18670743.pdf?src-supplier=Digi-Key, JESD-609 Code=e3, Joule-integral-Nom=4.14J, Mounting Technology="Through Hole", Packaging="Ammo Pack", Pricing="10=0.72600, 25=0.64500, 50=0.56600, 100=0.48000, 500=0.40600, 1000=0.35800, 2500=0.32700 (USD)", Reach SVHC Compliant=Yes, Reference Standard=UL, RoHS=Yes, RoHS Compliant=Yes, Stock=5000, Supplier=Newark, Terminal Finish=Tin, Termination="Pin Wire", Voltage Rating (DC)=125V
K1 K2 K3: library part PR12-12V-360-1A, "RELAY GEN PURPOSE SPDT 10A 12V", Ambient Temperature Range High=+85°C, Ambient Temperature Range Low=-40°C, Coil Power=250mW, Coil Resistance=576Ω, Coil Voltage=12V, Current Rating=10A, Manufacturer=TE, Automotive=No, Category=Relay, Coil Type=Non-Latching, ComponentLink2Description=Datasheet, ComponentLink2URL=https://www.te.com/usa-en/product-3-1393239-8.html?te_bu=Cor&te_type=other&te_campaign=oct_glo_cor-oct-global-oth-prtnr-fy19-oct-octo-buy-bom_sma-298_2&elqCampaignId=35216, Device Class L1=Electromechanical, Device Class L2=Relays, Device Class L3="Power Relays", Digikey Description="RELAY GEN PURPOSE SPDT 10A 12V", Footprint Url=PB1688-ND, Height=15.7mm, Lead Free=Yes, Manufacturer Part Number=3-1393239-8, Mouser Description="General Purpose Relays RT174012", Number Of Contacts=1, Octopart=https://octopart.com/3-1393239-8-te+connectivity-40497687, Package=3-1393239-8, RoHS=TRUE, Throw Configuration=SPDT
L1 L2 L3: library part SRP1265WA-2R2M_1, "2.2 H Shielded Wirewound Inductor 22 A 4.2mOhm Max Nonstandard FIXED IND 2.2UH 22A 4.2 MOHM SMD 13.5x12.5x6.4", Manufacturer_Name=Bourns, Manufacturer_Part_Number=SRP1265WA-2R2M, Mouser Part Number=652-SRP1265WA-2R2M, Datasheet Link=http://www.bourns.com/docs/Product-Datasheets/SRP1265WA.pdf, Geometry.Height=6.5mm, Mouser Price/Stock=https://www.mouser.co.uk/ProductDetail/Bourns/SRP1265WA-2R2M?qs=Li%252BoUPsLEnvRcUJ534J08A%3D%3D
P1 P2 P3 P4 P5 P6 P7 P8 P9 P10 P11 P12 P13 P14 P15 P16 P17 P18 P19 P20 P22 P23 P24 P25 P26 P27 P28 P29 P30 P31 P32 P33 P34 P35 P36 P37 P38 P39 P40: "Header, 2-Pin", LatestRevisionDate=17-Jul-2002, LatestRevisionNote="Re-released for DXP Platform.", Publisher="Altium Limited"
P21: library part PWR_CONN, "Header, 2-Pin", LatestRevisionDate=17-Jul-2002, LatestRevisionNote="Re-released for DXP Platform.", Publisher="Altium Limited"
Q1 Q2 Q3 Q4 Q5 Q6 Q7 Q8 Q9: "N-Channel MOSFET", LatestRevisionDate=17-Jul-2002, LatestRevisionNote="Re-released for DXP Platform.", PackageDescription="TO, Flat Index; 3 In-Line, Axial Leads; Body Dia. 4.6mm; Lead Dia. 0.5 mm (max)", PackageReference=E3, PackageVersion=1995/1996, Published=8-Jun-2000, Publisher="Altium Limited"
R1: library part CMP-02408-000051-1, "RES 1K OHM 0.6W 1% AXIAL", Case/Package=Axial, Max Operating Temperature=155°C, Max Power Dissipation=600mW, Min Operating Temperature=-55°C, Package Quantity=5000, Resistance=1kR, Resistance Tolerance=1%, Resistor Type="Metal Film", Temperature Coefficient=50ppm/°C, Voltage Rating=350V, Construction=Cylindrical, Contact Plating=Tin, Diameter=2.5mm, Lead Diameter=0.6mm, Lead Free="Lead Free", Length=6.5mm, Military Standard=Not, Mount="Through Hole", Number of Pins=2, Number of Terminations=2, Packaging="Tape and Reel", Power Rating=600mW, Radiation Hardening=No, RoHS Compliant=Yes, Series=MRS25, Technology="THIN FILM", Termination=Axial, Tolerance=1%, Voltage Rating (DC)=350V, Weight=0.00776oz, Width=2.5mm
R2 R3 R4 R5 R6 R7 R8 R9 R10 R11 R17 R18: library part CMP-02408-000035-1, "RES 10K OHM 0.6W 1% AXIAL", Case/Package=Conformal, Max Operating Temperature=155°C, Max Power Dissipation=600mW, Min Operating Temperature=-55°C, Resistance=10kR, Resistance Tolerance=1%, Resistor Type="Metal Film", Temperature Coefficient=50ppm/°C, Voltage Rating=300V, Construction=Cylindrical, Contact Plating=Tin, Diameter=2.5mm, Features="Automotive AEC-Q200", Lead Free="Lead Free", Length=6.5mm, Military Standard=Not, Number of Terminations=2, Packaging="Tape and Reel", Power Rating=600mW, Radiation Hardening=No, RoHS Compliant=Yes, Series="MBB 0207 - Professional", Technology="THIN FILM", Termination=Axial, Tolerance=1%, Voltage Rating (DC)=300V
R12 R14 R15 R20: library part "100k Resistor", "Fixed Resistor, Metal Film, 2W, 100000ohm, 500V, 5% +/-Tol, 250ppm/Cel, Through Hole Mount", Manufacturer="Vishay BCcomponents", Manufacturer Part Number=PR02000201003JA100, Max Operating Temperature=155°C, Min Operating Temperature=-55°C, Package Diameter=3.9mm, Package Length=12mm, Package Shape=Tubular, Package Style=AxialMeter, Power=2W, Rated Temperature=70°C, Resistor Type="FIXED RESISTOR", Supplier Part Number=594-5083NW100K0JA100, Temperature Coefficient=250ppm/°C, Tolerance=5%, Working Voltage=500V, Category="Through-Hole Resistors", ComponentLink1Description=https://datasheet.ciiva.com:443/pdfs/VipMasterIC/IC/VISH/VISH-S-A0005972021/VISH-S-A0005972021-1.pdf?src-supplier=IHS+Markit, ComponentLink1URL=https://datasheet.ciiva.com:443/pdfs/VipMasterIC/IC/VISH/VISH-S-A0005972021/VISH-S-A0005972021-1.pdf?src-supplier=IHS+Markit, ComponentLink2Description=https://datasheet.ciiva.com/11824/0900766b80d9a182-11824802.pdf?src-supplier=Rs, ComponentLink2URL=https://datasheet.ciiva.com/11824/0900766b80d9a182-11824802.pdf?src-supplier=Rs, ComponentLink3Description=https://datasheet.ciiva.com/48426/pr01-02-03-eng-tds-48426207.pdf?src-supplier=Distrelec, ComponentLink3URL=https://datasheet.ciiva.com/48426/pr01-02-03-eng-tds-48426207.pdf?src-supplier=Distrelec, Construction=Tubular, JESD-609 Code=e3, Lead Diameter=0.78mm, Mounting Technology="Through Hole", Packaging="Ammo Pack", Pins=2, Pricing="1=0.40000, 10=0.37000, 50=0.37000, 100=0.20900, 1000=0.08800, 10000=0.08800 (USD)", Reach SVHC Compliant=Yes, Reference Standard=AEC-Q200, RoHS=Yes, RoHS Compliant=Yes, Stock=11142, Supplier=Mouser, Technology="METAL FILM", Terminal Finish=Tin, Termination=Wire
R13 R16: library part "11k Resistor", "Fixed Resistor, Metal Film, 0.4W, 11000ohm, 350V, 1% +/-Tol, 50ppm/Cel, Through Hole Mount", Manufacturer="Vishay Semiconductors", Manufacturer Part Number=MBB02070C1102FC100, Max Operating Temperature=125°C, Min Operating Temperature=-55°C, Package Diameter=2.5mm, Package Length=6.5mm, Package Style=AxialMeter, Power=400mW, Rated Temperature=70°C, Resistor Type="FIXED RESISTOR", Supplier Part Number=594-MBB02070C1102FC1, Temperature Coefficient=50ppm/°C, Tolerance=1%, Working Voltage=350V, Additional Feature="RATED AC VOLTAGE: 350V", Category="Through-Hole Resistors", ComponentLink1Description=https://datasheet.ciiva.com:443/pdfs/VipMasterIC/IC/VISH/VISH-S-A0005972005/VISH-S-A0005972005-1.pdf?src-supplier=IHS+Markit, ComponentLink1URL=https://datasheet.ciiva.com:443/pdfs/VipMasterIC/IC/VISH/VISH-S-A0005972005/VISH-S-A0005972005-1.pdf?src-supplier=IHS+Markit, ComponentLink2Description=http://components.arrow.com/part/dataview/44454635S9668648N4052?src-supplier=Arrow+Electronics, ComponentLink2URL=http://components.arrow.com/part/dataview/44454635S9668648N4052?src-supplier=Arrow+Electronics, ComponentLink3Description=http://www.vishay.com/docs/28766/28766.pdf?src-supplier=Avnet, ComponentLink3URL=http://www.vishay.com/docs/28766/28766.pdf?src-supplier=Avnet, Construction=Tubular, JESD-609 Code=e3, Lead Diameter=0.6mm, Lead Length=28mm, Mounting Technology="Through Hole", Packaging="Ammo Pack", Pins=2, Pricing="1=0.40000, 10=0.30800, 50=0.30800, 100=0.13000, 500=0.09400, 1000=0.07100, 2000=0.06600, 10000=0.06600 (USD)", Reach SVHC Compliant=Yes, Reference Standard=AEC-Q200, RoHS=Yes, RoHS Compliant=Yes, Stock=999, Supplier=Mouser, Technology="THIN FILM", Terminal Finish=Nickel, Termination=Wire
U1: library part CMP-0188-00238-2, "2.7V Dual Channel 12-Bit A/D Converter with SPI Serial Interface, 8-Pin PDIP, C Performance Grade, Industrial Temperature", Code_JEDEC=MS-001, ComponentLink1Description="Manufacturer URL", ComponentLink1URL=http://www.microchip.com/, ComponentLink2Description=Datasheet, ComponentLink2URL=http://ww1.microchip.com/downloads/en/DeviceDoc/21034F.pdf, ComponentLink3Description="Package Specification", ComponentLink3URL=http://www.microchip.com/stellent/groups/techpub_sg/documents/packagingspec/en012702.pdf, DatasheetVersion="revF, Nov-2011", PackageDescription="8-Lead Plastic Dual In-Line (P) - 300 mil Body [PDIP]", PackageReference=PDIP300-P8, PackageVersion="revBB, Aug-2009", RevisionNote="URLs added. DatasheetVersion updated."
U2 U3 U4: library part CMP-0492-01609-1, "High Power No Rsense(TM) Current Mode Synchronous Step-Down Switching Regulator, 16-pin SOP (S-16), 0 to 70 degC, Pb-Free", Frequency Sync Range="150kHz - 225kHz", Manufacturer="Linear Technology", ComponentLink1Description="Manufacturer URL", ComponentLink1URL=http://www.linear.com/, ComponentLink2Description=Datasheet, ComponentLink2URL=http://cds.linear.com/docs/en/datasheet/1775f.pdf, ComponentLink3Description="Package Specification", ComponentLink3URL=http://cds.linear.com/docs/en/packaging/S16%2005-08-1610%20Rev%20G.pdf, Mounting Technology="Surface Mount", Number of Outputs=1, PackageDescription="16-Pin Plastic Small Outline, Body 9.9 x 3.9 mm, Pitch 1.27 mm", PackageReference=S-16, PackageVersion="Rev. G, 05/2012", PartNumber=LTC1775CS#PBF, RoHS=TRUE

## Via types
v1: diameter 50, hole 28, Top Layer to Bottom Layer, 36 vias

## Nets (pads, with @x,y where several pads share a name; then routed paths per layer and width w, separated by ;. In a path a pad name is that pad's centre, name@x,y a point inside that pad or via, vN(x,y) a via of type N, cw(c..) or ccw(c..) an arc to the next point about the centre after c; other vN are vias at no path point)
12V0_RELAY_TO_DC_MOTOR_1: F9.2 P17.1 | length 148
  Bottom Layer w40: P17.1 5629.53,1329.53 5629.53,1387.27 5680,1437.74 F9.2
12V0_RELAY_TO_DC_MOTOR_2: F10.2 P18.1 | length 153.1
  Bottom Layer w40: P18.1@4520,1320 4529.53,1329.53 4529.53,1369.53 F10.2
12V0_RELAY_TO_DC_MOTOR_3: F11.2 P19.1 | length 139.7
  Bottom Layer w40: P19.1 4916.17,1356.17 4916.17,1439.32 F11.2
12V0_RELAY_TO_DC_MOTOR_4: F12.2 P20.1 | length 148
  Bottom Layer w40: P20.1 5229.53,1329.53 5229.53,1387.27 5280,1437.74 F12.2
+5: C35.2 F1.2 F2.1 F3.1 P2.1 P3.1 P5.1 P7.1 P8.1 P9.1 P10.1 P11.1 P12.1 P13.1 P28.1 P29.1 P30.1 P31.1 P32.1 P33.1 P34.1 P35.1 P36.1 U1.8 U2.1 U3.1 U4.1 | length 17150.2
  Top Layer w10: P9.1 1040,1540 1300,1540 ; P28.1 1020,1760 1300,1760 ; P7.1 1021.57,2001.57 1301.57,2001.57 ; P2.1 1000,2200 1280,2200 ; P8.1 980,2400 1260,2400 ; P5.1 1020,2640 1300,2640 ; P12.1 1020,2860 1300,2860 ; v1(1100,3820) 1100,3796.26 1128.11,3768.15 U2.1 ; P36.1 1300,1540 ; P35.1 1300,1760 ; P10.1 1301.57,2001.57 ; P29.1 1280,2200 ; P3.1 1260,2400 ; P11.1 1300,2640 ; P13.1 1300,2860 ; P33.1 1620,2200 ; P32.1 1580,2400 ; P31.1 1600,2640 ; P30.1 1600,2860 ; F3.1 2056.85,1443.15 F2.1 1783.15,1933.7 1783.15,2143.15 ; v1(2660,3760) 2660,3741.65 2691.65,3710 U3.1 ; v1(4580,3700) 4580,3680 4590,3670 U4.1 ; 1260,2400 1580,2400 ; 1280,2200 1620,2200 ; 1300,1540 1300,1760 ; 1300,1760 1400,1760 P34.1 1641.57,2001.57 ; 1300,2640 1600,2640 ; 1300,2860 1600,2860 ; 1301.57,2001.57 1641.57,2001.57 ; 1580,2400 1783.15,2603.15 ; 1600,2640 1775,2815 1775,2851.85 F1.2 ; 1600,2860 F1.2 ; 1620,2200 1783.15,2363.15 ; 1641.57,2001.57 1783.15,2143.15 ; 1783.15,2143.15 1783.15,2363.15 ; 1783.15,2363.15 1783.15,2603.15 ; 1783.15,2603.15 F1.2
  Bottom Layer w10: F1.2 1160,2860 800,3220 800,3780 840,3820 v1(1100,3820) 1160,3760 2665.86,3760 2685.86,3780 4389.57,3780 4429.57,3740 4540,3740 v1(4580,3700) 4680,3800 4680,4280 5080,4680 5520,4680 U1.8 5675,4535 5675,4625.79 C35.2
+12: F4.2 F7.2 K1.4 K2.4 K3.4 P37.1 P38.1 P39.1 P40.1 Q4.1 Q7.1 Q9.1
  other v1: 5000,2250 5225,2250 2275,2275 2500,2275 3550,2375 3750,2375 5000,2425 5225,2425 2275,2450 2500,2450 3550,2525 3750,2525 5000,2575 5225,2575 2275,2600 2500,2600 3553,2649 3752,2658
\C\S\: P1.2 R11.2 | length 162.7
  Bottom Layer w10: R11.2 6136.85,3988.43 6240,4091.57 P1.2
BATT_CONNN: P21.2 S1.2
BG_5V: Q2.2 U2.10 | length 425.9
  Top Layer w10: Q2.2 1300,3155 1421.18,3276.18 1421.18,3438.86 1391.89,3468.15 U2.10
BG_12V_1: Q5.2 U3.10 | length 460.8
  Top Layer w10: Q5.2 2900,3060 2984.21,3144.21 2984.21,3395.79 2973.07,3406.93 2923.07,3406.93 U3.10
BG_12V_2: Q8.2 U4.10 | length 397.7
  Top Layer w10: Q8.2 4740,3220 4795.79,3275.79 4795.79,3336.47 4829.32,3370 U4.10
BOOST_5V: C1.2 D2.2 U2.12 | length 1114.3
  Top Layer w10: D2.2 929,3500 873,3444 873,3369 905,3337 1123,3337 v1(1160,3300) ; v1(1260,3560) 1268.15,3568.15 U2.12
  Bottom Layer w10: v1(1160,3300) 1260,3400 v1(1260,3560) ; v1@1165.86,3300 1185.86,3280 1356.11,3280 1376.11,3300 C1.2
BOOST_12V_1: C7.1 D3.2 U3.12 | length 1162.7
  Top Layer w10: D3.2 2510,3420 2444,3354 2444,3293 2497,3240 C7.1 ; v1(2820,3480) 2825.43,3485.43 2860,3485.43 2884.57,3510 U3.12
  Bottom Layer w10: v1(2820,3480) 2820,3356.57 2800,3336.57 2800,3280 2840,3240 C7.1
BOOST_12V_2: C21.1 D5.2 U4.12 | length 1155.6
  Top Layer w10: D5.2 4425.43,3389.43 4386.43,3389.43 4357,3360 4357,3249 4388,3218 4631.18,3218 4649.18,3200 v1(4660,3200) ; v1(4760,3440) 4793.36,3473.36 4856.64,3473.36 U4.12
  Bottom Layer w10: v1(4660,3200) C21.1 4760,3321.57 v1(4760,3440)
CH0: C5.2 R1.2 U1.2 | length 342.3
  Bottom Layer w10: R1.2 5156.85,4533.94 C5.2 5260.39,4430.39 5369.61,4430.39 U1.2
CLK: P1.1 R18.2 | length 136.3
  Bottom Layer w10: R18.2 6144.35,4127.5 6167.5,4127.5 P1.1
CNTRL_DC_MOTOR_RELAY: P23.2 Q9.2 | length 1174.8
  Bottom Layer w10: Q9.2 5681.47,2300 5704.57,2276.9 5704.57,2275.43 5960,2020 5960,1440 P23.2
CNTRL_STEP_RELAY: P22.1 Q7.2 | length 1789.8
  Bottom Layer w10: P22.1 3180,1880 3590,2290 Q7.2
CNTRL_VACUUM_RELAY: P22.2 Q4.2 | length 974
  Bottom Layer w10: Q4.2 3001.47,2260 3024.57,2236.9 3024.57,2235.43 3080,2180 P22.2
COMP_5V: C15.1 C16.1 R3.1 | length 263.2
  Top Layer w10: R3.1 843.15,4132.36 C16.1 C15.1
COMP_12V_1: C12.1 C30.1 R2.1 | length 326.1
  Bottom Layer w10: R2.1 2363.15,3973.94 C30.1 C12.1
COMP_12V_2: C27.2 C37.2 R5.1 | length 250.8
  Bottom Layer w10: R5.1 C27.2 C37.2
DC_MOTOR_COIL: K3.1 Q9.3 R7.2 | length 551
  Bottom Layer w20: K3.1 5532.44,2100 Q9.3 5681.47,2100 5704.57,2076.9 5704.57,2075.43 5880,1900 R7.2
DC_MOTOR_RLY_TO_FUSE: F9.1 F10.1 F11.1 F12.1 K3.2
DIN: P27.1 R9.2 | length 460.2
  Bottom Layer w10: R9.2 6053.7,4520 P27.1
DOUT: P27.2 R8.2 | length 238.8
  Bottom Layer w10: R8.2 6133.7,4620 P27.2
GND: C2.2 C3.1 C4.1 C5.1 C6.2 C8.1 C9.1 C10.2 C11.1 C12.2 C13.1 C14.1 C15.2 C16.2 C17.2 C18.1 C19.2 C20.2 C22.1 C23.1 C24.1 C25.2 C26.1 C27.1 C28.1 C29.1 C30.2 C31.2 C32.1 C33.1 C34.1 C35.1 C37.1 D1.1 D1.3 D4.1 D4.3 D6.1 D6.3 K1.3 K2.3 K3.3 MH1.1 MH2.1 MH3.1 MH4.1 MH5.1 MH6.1 P2.2 P3.2 P4.2 P5.2 P6.2 P7.2 P8.2 P9.2 P10.2 P11.2 P12.2 P13.2 P14.2 P15.2 P16.2 P17.2 P18.2 P19.2 P20.2 P21.1 P24.1 P24.2 P25.1 P25.2 P26.1 P26.2 P28.2 P29.2 P30.2 P31.2 P32.2 P33.2 P34.2 P35.2 P36.2 P37.2 P38.2 P39.2 P40.2 Q2.3 Q5.3 Q8.3 R4.1 R6.1 R7.1 R13.1 R16.1 R17.1 U1.3 U1.4 U2.6 U2.9 U3.6 U3.9 U4.6 U4.9 | length 691.1
  Top Layer w10: v1(1060,3560) 1060,3550.82 1092.67,3518.15 U2.6 ; v1(1280,3340) 1280,3350.82 1318.55,3389.37 1318.55,3410.04 1326.66,3418.15 U2.9 ; v1(2620,3480) 2630.82,3480 2650.48,3460.35 2663.99,3460.35 2664.34,3460 U3.6 ; v1(2860,3300) 2860,3310.82 2881.21,3332.03 2881.21,3351.89 2889.32,3360 U3.9 ; v1(4556,3420) U4.6 ; U4.9 4929.18,3320 4949.18,3300 v1(4960,3300)
INTVCC_5V: C17.1 D2.1 D2.3 U2.4 U2.8 U2.11 | length 1052.1
  Top Layer w10: D2.3@980.24,3600 998.39,3618.15 U2.4 ; U2.11 1292.24,3518.15 1202.34,3428.24 1202.34,3426.26 1194.22,3418.15 D2.1@980,3418.15 ; D2.1@980,3418.15 979.3,3417.69 960,3405 D2.1@980,3418.15
  Bottom Layer w10: D2.3 927,3600 880,3553 880,3455 930,3405 D2.1 946.47,3405 980,3371.47 C17.1
INTVCC_12V_1: C19.1 D3.1 D3.3 U3.4 U3.11 | length 1146.5
  Top Layer w10: D3.3 2535,3520 2575,3560 U3.4 ; D3.1 2783,3325 2821,3363 2821,3396.43 2884.57,3460 U3.11
  Bottom Layer w10: D3.3 2518.53,3520 2495.43,3496.9 2495.43,3495.43 2444,3444 2444,3387 2506,3325 D3.1 2526.47,3325 2560,3291.47 C19.1
INTVCC_12V_2: C28.2 D5.1 D5.3 U4.4 U4.11 | length 1179.4
  Top Layer w10: D5.3 4463.53,3499 4484.53,3520 U4.4 ; D5.1 4441.47,3304 4469.32,3276.15 4469.32,3274.68 4483,3261 4692,3261 4761,3330 4761,3356.43 4824.57,3420 U4.11
  Bottom Layer w10: D5.3 4433.53,3499 4410.43,3475.9 4410.43,3474.43 4362,3426 4362,3367 4425,3304 D5.1 4440,3291.72 4480,3251.72 C28.2
NetF2_2: F2.2 P4.1 | length 163.1
  Top Layer w10: P4.1 F2.2
NetF3_2: F3.2 P6.1 | length 160
  Top Layer w10: P6.1 F3.2
NetR2_2: R2.2 U3.5 | length 416
  Top Layer w10: U3.5 2757.77,3510 2765.88,3518.11 2765.88,3522.66 2800,3556.78 2800,3816.85 R2.2
NetR3_2: R3.2 U2.5 | length 483
  Top Layer w10: U2.5 1198.98,3568.15 1236.85,3606.02 R3.2
NetR5_2: R5.2 U4.5 | length 482.8
  Top Layer w10: U4.5 4702.52,3470 4731.3,3498.78 4731.3,3576.23 4731.3,3581.92 4729.1,3584.12 4729.1,3605.88 4731.3,3608.08 4731.3,3697.6 4712,3716.9 4712,3755.57 4756.43,3800 R5.2
NetR8_1: R8.1 U1.6 | length 415.6
  Bottom Layer w10: U1.6 5766.64,4330 5816.64,4380 5980,4380 R8.1
NetR9_1: R9.1 U1.5 | length 227.3
  Bottom Layer w10: U1.5 5770,4230 R9.1
NetR11_1: R11.1 U1.1 | length 704.6
  Bottom Layer w10: U1.1 5559.04,4340.96 5559.04,4164.11 R11.1
NetR12_2: R12.2 R20.1 | length 160
  Bottom Layer w10: R20.1 R12.2
NetR14_1: R14.1 R15.2 | length 144.5
  Bottom Layer w10: R14.1 5920,3680 5923.15,3676.85 R15.2
NetR18_1: R18.1 U1.7 | length 407
  Bottom Layer w10: U1.7 5620,4380 5620,4200 5700,4120 R18.1
P12V0_RELAY_TO_STEPPER1: F6.2 P15.1 | length 156.3
  Bottom Layer w40: P15.1 3637.94,1397.94 3637.94,1441.08 F6.2
P12V0_RELAY_TO_STEPPER2: F8.2 P16.1 | length 139.7
  Bottom Layer w40: F8.2 3943.83,1439.32 3943.83,1356.17 P16.1
P12V0_RELAY_TO_VACUUM: F5.2 P14.1 | length 111.4
  Bottom Layer w40: F5.2 2703.83,1419.32 2703.83,1336.17 P14.1
PP_VBATT: C2.1 C3.2 C4.2 C8.2 C10.1 C18.2 C31.1 C32.2 C33.2 C34.2 Q1.1 Q3.1 Q6.1 R10.2 S1.1 U2.15 U2.16 U3.15 U3.16 U4.15 U4.16 | length 1252.9
  Bottom Layer w20: S1.1 3200,4760 R10.2
RC_FILTER: R1.1 R10.1 R17.2 | length 226.3
  Bottom Layer w10: R10.1 R17.2 R1.1
SS_5V: C13.2 U2.3 | length 164.1
  Top Layer w10: C13.2 1101.06,3668.15 U2.3
SS_12V_1: C9.2 U3.3 | length 195.2
  Top Layer w10: C9.2 2659.21,3610 U3.3
SS_12V_2: C24.2 U4.3 | length 196.1
  Top Layer w10: C24.2 4570,3570 U4.3
STEPPER_COIL: K2.1 Q7.3 R6.2 | length 457.2
  Bottom Layer w20: K2.1 4024.84,2094.84 4235.16,2094.84 Q7.3 R6.2
STEPPER_RLY_TO_FUSE: F6.1 F8.1 K2.2
SW_5V: C1.1 D1.2 L1.1 Q1.3 Q2.1 U2.14
SW_12V_1: C7.2 D4.2 L2.1 Q3.3 Q5.1 U3.14
SW_12V_2: C21.2 D6.2 L3.1 Q6.3 Q8.1 U4.14
TG_5V: Q1.2 U2.13 | length 842
  Top Layer w10: U2.13 1321.02,3618.15 1264.14,3675.03 1264.14,3884.14 1460,4080 Q1.2
TG_12V_1: Q3.2 U3.13 | length 782.2
  Top Layer w10: U3.13 2918.94,3561.06 2864.92,3561.06 2821.41,3604.57 2821.41,3840 3032.09,4050.68 3150.68,4050.68 Q3.2
TG_12V_2: Q6.2 U4.13 | length 876.8
  Top Layer w10: v1(4752,3739) 4752,3563.79 4795.79,3520 U4.13
  Bottom Layer w10: v1(4752,3739) 4752,3812 4980,4040 Q6.2
VACUUM_COIL: K1.1 Q4.3 R4.2 | length 544.4
  Bottom Layer w20: K1.1 2960.32,2099.68 Q4.3 3000,1876.85 R4.2
VACUUM_RLY_TO_FUSE: F5.1 K1.2
VOSENSE_12V_1: R12.1 R13.2 U3.7 | length 2314.6
  Top Layer w10: v1(2620,3400) 2626.64,3406.64 2723.73,3406.64 U3.7 ; R12.1 R12.1@4083.15,3340
  Bottom Layer w10: v1(2620,3400) 2620,3208 2820.74,3007.26 2923,2905 3645,2905 3758,3018 3889,3018 4080,3209 R12.1 4083.15,3340 R13.2
VOSENSE_12V_2: R15.1 R16.2 U4.7 | length 2340.8
  Top Layer w10: v1(4555,3334) 4595.65,3334 4631.65,3370 U4.7
  Bottom Layer w10: v1(4555,3334) 4555,3093 4657.64,2990.36 4719,2929 5899,2929 6060,3090 R15.1 R16.2
VOUT_5V: C6.1 C11.2 C14.2 F1.1 L1.2 U2.7 | length 1547.1
  Top Layer w10: v1@1080,3480 1091.85,3468.15 U2.7
  Bottom Layer w10: v1(1060,3480) 1060,3183 1225,3018 2037.37,3018 C11.2
VOUT_12V_1: C20.1 C22.2 C23.2 F4.1 L2.2 R20.2
VOUT_12V_2: C25.1 C26.2 C29.2 F7.1 L3.2 R14.2
pads on no net: P23.1 U2.2 U3.2 U3.8 U4.2 U4.8

## Polygon pours and split planes (outlines as drawn)
GND on Top Layer "GND_L01_P015" (solid, pour order 15): 440,5040 460,5060 6360,5060 6360,1120 6380,1100 6360,1080 420,1080
PP_VBATT on Top Layer "PP_VBATT_L01_P007" (solid, pour order 7): 660,4340 1020,4340 1269.8,4090.2 1257.49,3600 5130,3600 5340,3900 5340,4200 5060,4480 3340,4480 3180,4640 3180,4920 980,4920 660,4600
+12 on Top Layer "+12_L01_P010" (solid, pour order 10): 5400,2980 5820,2560 5820,2180 5760,2120 2200,2120 2060,2260 2060,2780 2400,2780 2580,2960 3420,2960 3480,2900 3473.23,2893.23 3473.23,2780 4260,2780 4460,2980
SW_12V_2 on Top Layer "SW_12V_2_L01_P000" (solid, pour order 0): 4800,3579.28 4800,3582 4820.85,3602.86 4922.86,3602.86 4960,3640 4960,3880 5410.22,3880 5410.22,2980 5240,2980 4800,2980
VOUT_5V on Top Layer "VOUT_5V_L01_P009" (solid, pour order 9): 1940,3740 2640,3740 2640,2780 1940,2780
SW_5V on Top Layer "SW_5V_L01_P003" (solid, pour order 3): 1280,3680.8 1294.9,3695.7 1395.7,3695.7 1420,3720 1420,3940 1900,3940 1940,3900 1940,3040 1840,2940 1440,2940 1340,3040 1340,3200 1440,3300 1440,3444.28 1384.28,3500 1320,3500 1280,3540
SW_12V_1 on Top Layer "SW_12V_1_L01_P002" (solid, pour order 2): 2860,3600 2860,3622 2880.85,3642.86 2982.86,3642.86 3000,3660 3000,3920 3460,3920 3460,3000 3420,2960 2940,2960 2940,3120 2980,3160 2980,3540 3000,3560 2980,3580 2880,3580
VOUT_12V_1 on Top Layer "VOUT_12V_1_L01_P001" (solid, pour order 1): 3460,3740 4220,3740 4360,3600 4360,2880 4260,2780 3473.23,2780
VACUUM_RLY_TO_FUSE on Top Layer "VACUUM_RLY_TO_FUSE_L01_P014" (solid, pour order 14): 2680,2120 2860,1940 2860,1480 2780,1400 2280,1400 2100,1580 2100,2040 2180,2120
STEPPER_RLY_TO_FUSE on Top Layer "STEPPER_RLY_TO_FUSE_L01_P013" (solid, pour order 13): 4080,2120 4180,2020 4180,1460 4160,1440 3160,1440 3040,1560 3040,2120
DC_MOTOR_RLY_TO_FUSE on Top Layer "DC_MOTOR_RLY_TO_FUSE_L01_P012" (solid, pour order 12): 5620,2120 5820,1920 5820,1580 5740,1500 4440,1500 4360,1580 4360,2060 4420,2120
VOUT_12V_2 on Top Layer "VOUT_12V_2_L01_P011" (solid, pour order 11): 5410.22,3880 6280,3880 6280,3120 6240,3080 6060,3080 6060,3060 6040,3040 6040,2760 5980,2700 5420,2700
BATT_CONNN on Top Layer "BATT_CONNN_L01_P008" (solid, pour order 8): 4120,4920 4220,4820 4220,4480 4160,4420 3320,4420 3260,4480 3160,4580 3160,4920
+12 on Layer 1 "+12_L02_P016" (solid, pour order 16): 600,5040 6540,5040 6540,1120 580,1120
GND on Layer 2 "GND_L03_P017" (solid, pour order 17): 600,5020 6520,5020 6500,5000 6500,1100 600,1100 580,1120

## Silkscreen, mask and mechanical layers (free items; w line width, h text height)
Top Overlay:
  text "SWITCH" at 3010,4850 h60
  text "VBATT" at 3470,4850 h60
  text "DMM" at 5270,4830 h60
  text "StairMasters PDB" at 1030,4810 h60
  text "Spring 2023" at 1030,4689.99 h60
  text "MISO" at 6330,4590 h30
  text "-" at 3730,4520 h20 r180
  text "+" at 3530,4513.33 h20 r180
  text "MOSI" at 6330,4490 h30
  text "CLK" at 6330,4190 h30
  text "CS" at 6330,4070 h30
  text "GND" at 6310,2990 h30 r90
  text "-" at 6110,2960 h20 r180
  text "-" at 6210,2960 h20 r180
  text "GND" at 6310,2730 h30 r90
  text "-" at 6110,2700 h20 r180
  text "-" at 6210,2700 h20 r180
  text "GND" at 6310,2510 h30 r90
  text "-" at 6110,2500 h20 r180
  text "-" at 6210,2500 h20 r180
  text "12V" at 6310,2270 h30 r90
  text "-" at 6210,2260 h20 r180
  text "+" at 6110,2253.33 h20 r180
  text "12V" at 6310,2050 h30 r90
  text "5V PWR CONNECT" at 720,2012 h60 r90
  text "-" at 6210,2000 h20 r180
  text "+" at 6110,1993.33 h20 r180
  text "12V" at 6310,1830 h30 r90
  text "-" at 6210,1780 h20 r180
  text "+" at 6110,1773.33 h20 r180
  text "12V" at 6310,1610 h30 r90
  text "-" at 6210,1600 h20 r180
  text "+" at 6110,1593.33 h20 r180
  text "MEGA (2A FUSED)" at 1370,1550 h30
  text "JETSON (2A FUSED)" at 1350,1330 h30
  text "+" at 3565,1247.33 h20 r180
  text "-" at 3667,1247 h20 r180
  text "+" at 5616,1245.33 h20 r180
  text "+" at 3987,1244.33 h20 r180
  text "-" at 4991,1243 h20 r180
  text "-" at 5734,1242 h20 r180
  text "-" at 4092,1241 h20 r180
  text "-" at 5338,1241 h20 r180
  text "-" at 4635,1240 h20 r180
  text "+" at 4872,1240.33 h20 r180
  text "+" at 4525,1238.33 h20 r180
  text "+" at 5214,1237.33 h20 r180
  text "+" at 2690,1226.67 h20
  text "-" at 2810,1220 h20
  text "VACUUM" at 2690,1170 h30
  text "VAC ON" at 2950,1170 h30
  text "STEP ON" at 3170,1170 h30
  text "STEP 1" at 3530,1170 h30
  text "STEP 2" at 3950,1170 h30
  text "DC 1" at 4550,1170 h30
  text "DC 2" at 4890,1170 h30
  text "DC 3" at 5230,1170 h30
  text "DC 4" at 5610,1170 h30
  text "DC ON" at 6030,1170 h30
Mechanical 1:
  the board outline again, w0

## Text inside footprints (layer, text, board x,y; h text height)
D1: Top Overlay "A" at 1600,3050 h59.05 r270; Top Overlay "K" at 1710,3055 h59.05 r270; Top Overlay "A" at 1825,3050 h59.05 r270
D2: Top Overlay "A" at 850,3640 h59.05 r180; Top Overlay "K" at 855,3530 h59.05 r180; Top Overlay "A" at 850,3415 h59.05 r180
D3: Top Overlay "A" at 2430,3560 h59.05 r180; Top Overlay "K" at 2435,3450 h59.05 r180; Top Overlay "A" at 2430,3335 h59.05 r180
D4: Top Overlay "A" at 3200,2950 h59.05 r270; Top Overlay "K" at 3310,2955 h59.05 r270; Top Overlay "A" at 3425,2950 h59.05 r270
D5: Top Overlay "A" at 4345,3539 h59.05 r180; Top Overlay "K" at 4350,3429 h59.05 r180; Top Overlay "A" at 4345,3314 h59.05 r180
D6: Top Overlay "A" at 5060,2950 h59.05 r270; Top Overlay "K" at 5170,2955 h59.05 r270; Top Overlay "A" at 5285,2950 h59.05 r270
Q1: Top Overlay "G" at 1790,4065 h59.05; Top Overlay "S" at 1790,3840 h59.05; Top Overlay "D" at 1790,3955 h59.05
Q2: Top Overlay "D" at 1431,3014 h59.05 r90; Top Overlay "S" at 1536,3014 h59.05 r90; Top Overlay "G" at 1328,3012 h59.05 r90
Q3: Top Overlay "G" at 3250,4045 h59.05; Top Overlay "S" at 3250,3820 h59.05; Top Overlay "D" at 3250,3935 h59.05
Q4: Top Overlay "D" at 3090,2135 h59.05; Top Overlay "S" at 3090,2020 h59.05; Top Overlay "G" at 3090,2245 h59.05
Q5: Top Overlay "G" at 2915,3130 h59.05 r90; Top Overlay "S" at 3140,3130 h59.05 r90; Top Overlay "D" at 3025,3130 h59.05 r90
Q6: Top Overlay "D" at 5250,3915 h59.05; Top Overlay "S" at 5250,3800 h59.05; Top Overlay "G" at 5250,4025 h59.05
Q7: Top Overlay "G" at 4330,2275 h59.05; Top Overlay "S" at 4330,2050 h59.05; Top Overlay "D" at 4330,2165 h59.05
Q8: Top Overlay "D" at 4872,2901 h59.05 r90; Top Overlay "S" at 4982,2905 h59.05 r90; Top Overlay "G" at 4768,2900 h59.05 r90
Q9: Top Overlay "G" at 5770,2285 h59.05; Top Overlay "S" at 5770,2060 h59.05; Top Overlay "D" at 5770,2175 h59.05